# Altium PCB PCB_Auto.PcbDoc (part 2 of 2)
Units mil, origin at the board's own origin, x right, y up, seen from the top; angles counter-clockwise.
Board outline 2561 x 3309 mil, 4 copper layers (Top Layer, Mid Layer 1, Mid Layer 2, Bottom Layer), stack 61.811 mil thick; 134 components, 109 nets, 467 pads, 114 vias.
Unrouted connection lines stored in the file: 1.
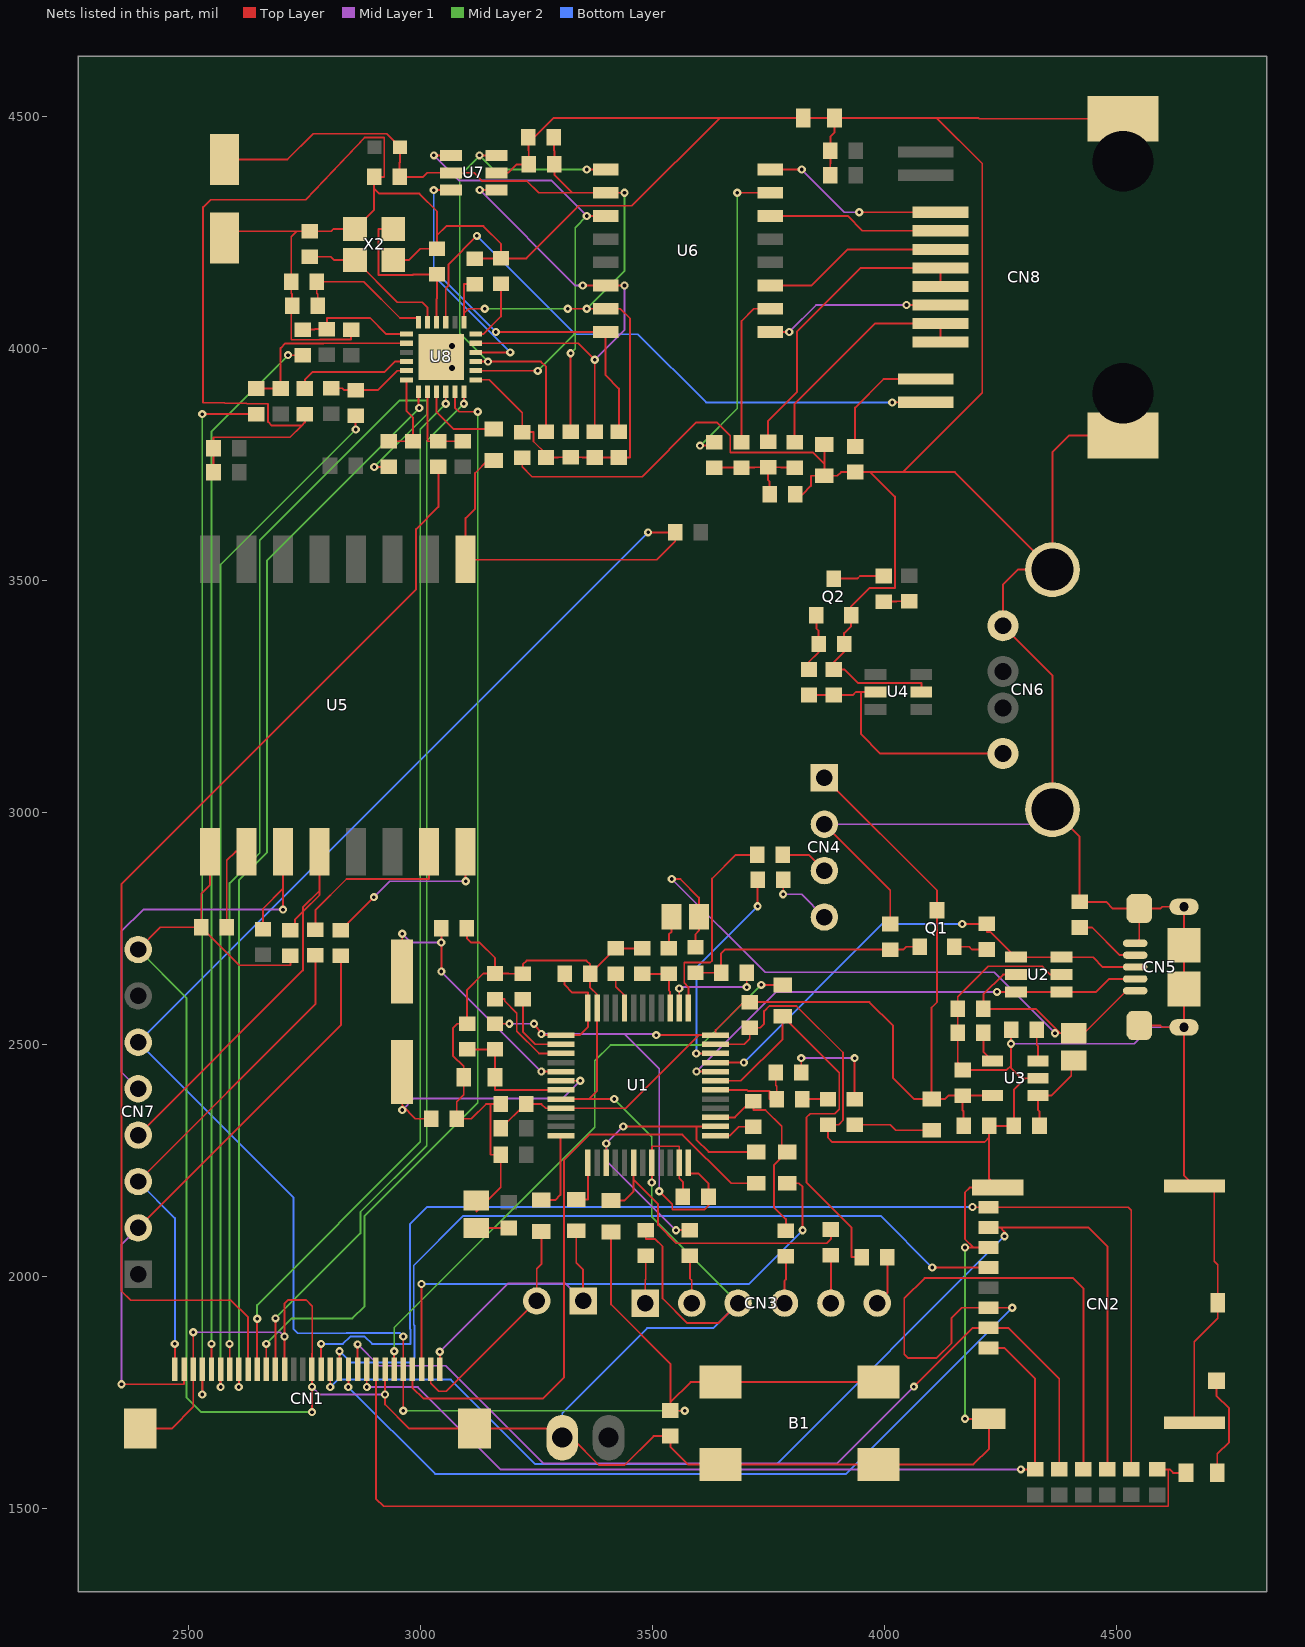
[diagram p4: the nets of this part, all layers, seen from the top]

## Via types
v1: diameter 17.72, hole 7.87, Top Layer to Bottom Layer, 112 vias
v2: diameter 25.98, hole 12.99, Top Layer to Bottom Layer, 2 vias

## Nets (pads, with @x,y where several pads share a name; then routed paths per layer and width w, separated by ;. In a path a pad name is that pad's centre, name@x,y a point inside that pad or via, vN(x,y) a via of type N, cw(c..) or ccw(c..) an arc to the next point about the centre after c; other vN are vias at no path point) (continued)
GND: B1.1 B1.4 C1.2 C2.1 C3.1 C4.2 C5.1 C6.1 C7.2 C8.2 C9.1 C10.2 C11.1 C12.1 C13.1 C14.1 C15.1 C16.2 C17.2 C18.1 C19.1 C20.2 C21.2 C22.2 C23.2 C24.2 C25.2 C26.2 C27.2 C28.1 C29.1 CN1.7 CN1.15 CN1.18 CN1.28 CN1.MP1 CN1.MP2 CN2.DSW2 CN2.MP1 CN2.MP2 CN2.MP3 CN2.MP4 CN2.P6 CN3.3 CN4.2 CN5.5 CN5.S CN6.4 CN6.S CN7.8 CN8.MP1 CN8.MP2 CN9.2 D4.2 D5.1 Q2.2 R8.2 R9.2 R10.2 R11.1 R14.2 R20.1 R28.1 R30.1 R33.1 R36.2 R38.2 R46.2 R52.1 R61.1 R62.1 R63.1 SB2.1 SB10.1 SB10.2 SB11.1 SB11.2 U1.8 U1.20 U1.23 U1.35 U1.47 U2.2 U3.2 U4.2 U5.9 U7.2 U8.25 X2.2 X2.4 | length 22909.3
  Top Layer w4: CN7.8@2392,2704 2440,2752 R36.2@2527.88,2752 ; CN1.MP2@2396.5,1671.44 2464,1671.44 2510.67,1718.11 CN1.28@2510.67,1799.4 v1(2510.67,1879) ; U5.9@2546.61,2915.04 2546.61,2842.73 2527.88,2824 R36.2@2527.88,2752 ; C16.2@2554.44,3733 C17.2@2554.44,3784.25 2554.44,3808 2719.24,3808 2744.24,3833 ; C25.2@2578,4237.35 2578,4252 2733.88,4252 ; CN1.18@2707.52,1799.4 v1(2707.52,1869.85) 2707.52,1941.35 2715.03,1948.86 2753.71,1948.86 2767.06,1935.51 2767.06,1869.63 CN1.15@2766.57,1799.4 v1(2766.57,1761.43) v1(2766.57,1707) ; R38.2@2720,2690.44 2720,2670 2610,2670 2528,2752 R36.2@2527.88,2752 ; R46.2@2751.24,3857.88 2751.24,3840 2744.24,3833 ; C22.2@2851,4040 2851,4019 2784,4019 2783.25,4018.25 2722,4018.25 2722,4091 C21.2@2723.88,4091 2723.88,4116 2721.88,4118 C20.2@2721.88,4143.25 2721.88,4240 2733.88,4252 ; CN1.7@2924.06,1799.4 v1(2924.06,1745) 2924.06,1723.39 2976,1671.44 CN1.MP1@3116.97,1671.44 3306,1671.44 CN9.2@3306,1652 3326,1652 3385,1593 3440.56,1593 3503,1655.44 C1.2@3539,1655.44 3539,1632 3576.58,1594.42 B1.1@3646.72,1594.42 B1.4@3987.28,1594.42 4192,1594.42 4226,1628.42 4226,1692.54 CN2.MP1@4225.53,1692.54 v1(4174,1692.54) ; X2.2@2942,4190.07 2976,4190.07 3000.05,4214.12 C18.1@3036,4214.12 3036,4243 ; C8.2@3100.56,2750 3100.56,2728 3109.14,2719.42 3127.58,2719.42 3161,2686 R11.1@3161,2652.29 ; C23.2@3117,4193.12 3145,4193.12 3145.44,4193.56 R52.1@3174,4193.56 ; D5.1@3121,2163.06 3121,2139 3173.44,2191.44 R14.2@3173.44,2261.56 3151,2261.56 3151,2371 ; U7.2@3164.21,4378 3190,4378 3208,4396 C27.2@3233.88,4396 3233.88,4425 3232.88,4426 C26.2@3232.88,4455 3246,4455 3287,4496 3645,4496 ; C12.1@3173.44,2371 3151,2371 ; C24.2@3219.75,3763.88 3219.75,3744 3240.75,3723 3478,3723 3595,3840 3639,3840 3668,3811 3668,3775 3847,3775 3870.91,3751.09 ; U1.8@3302.82,2381.71 3362.8,2381.71 ; v1(3418,2381.71) 3362.8,2381.71 ; R8.2@3478.65,2706.56 R9.2@3421.39,2706.56 3421,2706.56 C14.1@3366.11,2651.67 ; R20.1@3486,2099.12 3486,2080 3506,2080 3522,2064 3522,1952 3575,1899 3642,1899 CN3.3@3685,1942 ; v1(3499,2202) 3499.2,2202.2 U1.20@3499.2,2244.38 3499.2,2280 3558.26,2280 U1.23@3558.26,2244.38 3558.26,2210.74 3566,2203 C13.1@3566,2170.91 ; U1.35@3636.53,2499.82 3697.82,2499.82 3710,2512 C11.1@3710,2535.44 3732.44,2535.44 3741,2544 3741,2571.25 3752,2582.25 3810.75,2582.25 3911,2482 3911,2336 3901.44,2326.44 D4.2@3878.75,2326.44 3878.75,2298.25 3888,2289 4216,2289 4226,2299 ; C29.1@3808,3685 3824,3685 3842,3703 3842,3725 SB10.2@3870.91,3725 ; SB10.1@3870.91,3792.5 3870.91,3751.09 ; CN4.2@3871,2974 4013,2832 R28.1@4013,2759 ; R62.1@3883.44,4373 3883.44,4398 3883.77,4398.33 R63.1@3883.77,4425.25 3883.77,4456 3893,4465.23 SB11.1@3893,4496 ; U4.2@4079.76,3259 4080,3259 4080,3278 3943.56,3278 3914,3307.56 C15.1@3891,3307.56 3891,3323 3913.56,3345.56 R33.1@3913.56,3362.45 3913.56,3386 3928.4,3400.84 Q2.2@3928.4,3424.63 3928.4,3443.4 3968,3483 4023,3483 4023,3680 3970,3733 ; C6.1@4168.69,2444.25 C6.1@4168.69,2450.31 ; v1(4174,2061.83) 4192,2061.83 ; CN2.P6@4224.94,2061.83 4192,2061.83 ; v1(4273,2501) v1@4273.44,2501.44 ; C4.2@4273.44,2531.16 v1@4273.44,2501.44 ; U3.2@4331.52,2426.53 4304,2426.53 ; U2.2@4382.21,2650 4358,2650 4340,2668 4224,2668 4158.44,2602.44 C2.1@4158.44,2576 C5.1@4158.44,2524.75 4158.44,2460.56 C6.1@4168.69,2450.31 ; CN8.MP1@4514.66,3811.66 4398.04,3811.66 4362.38,3776 CN6.S@4362.38,3522.66 ; CN8.MP2@4514.66,4494.34 4204.66,4494.34 4203,4496 4113,4496 ; CN5.5@4540.69,2717.43 4549.54,2726.28 CN5.S@4549.54,2792.23 ; CN5.S@4549.54,2540.26 4595,2540.26 4598.94,2536.32 CN5.S@4646,2536.32 ; CN2.MP4@4668.44,1683.88 4668,1683.88 4668,1858.57 4718.64,1909.21 CN2.DSW2@4718.64,1942.74 4718.64,2025 4711,2032.64 4711,2194.12 CN2.MP3@4668.44,2194.12 4646,2216.56 CN5.S@4646,2536.32 ; 2733.88,4252 C19.1@2762,4252 2808,4252 2813,4257 X2.4@2859.32,4257 2900.44,4298.12 2900.44,4344 ; 2744.24,3833 2680,3833 2672,3841 2672,3880 2532,3883 2532,4304 2548,4320 2753,4320 2880,4454 2922.5,4454 2922.5,4369 C28.1@2900.44,4369 2900.44,4344 ; 2900.44,4344 2911.44,4333 2998,4333 3036,4295 3036,4243 ; 3036,4243 3056,4263 3136,4263 3174,4225 R52.1@3174,4193.56 ; 3151,2371 3141.6,2371 3110,2339.4 C10.2@3078.56,2339.4 3078.56,2376 3093.58,2391.02 SB2.1@3093.58,2429.14 3093.58,2452 3070.42,2475.15 3070.42,2534.28 3080,2543.85 C9.1@3101,2543.85 3101,2617.29 3136,2652.29 R11.1@3161,2652.29 ; R11.1@3161,2652.29 3190,2652.29 3190.61,2651.68 R10.2@3221,2651.68 3221,2672 3229,2680 3358.11,2680 3366.11,2672 C14.1@3366.11,2651.67 ; R52.1@3174,4193.56 3228.56,4193.56 3342,4307 3456,4307 3645,4496 ; 3362.8,2381.71 3381.09,2400 U1.47@3381.09,2578.08 3381.09,2607 3366.11,2621.98 C14.1@3366.11,2651.56 C14.1@3366.11,2651.67 ; 3645,4496 SB11.2@3825.5,4496 SB11.1@3893,4496 ; SB10.2@3870.91,3725 3870.91,3751.09 ; SB10.2@3870.91,3725 3899,3725 3907,3733 R61.1@3937,3733 3970,3733 ; SB11.1@3893,4496 4113,4496 ; 3970,3733 4040,3733 ; 4040,3733 4152.04,3733 CN6.S@4362.38,3522.66 ; 4040,3733 4211,3904 4211,4398 4113,4496 ; C6.1@4168.69,2450.31 4174.56,2444.44 4264,2444.44 4273.44,2453.88 ; 4192,2061.83 4174,2079.83 4174,2180.97 4184,2190.97 CN2.MP2@4244.62,2190.97 4226,2209.59 4226,2299 ; 4226,2299 C7.2@4226,2324 C3.1@4279.32,2324 4279.32,2401.85 4304,2426.53 ; 4273.44,2453.88 4273.44,2501 v1@4273.44,2501.44 ; 4273.44,2453.88 4273.44,2448 4294.91,2426.53 4304,2426.53 ; CN6.S@4362.38,3522.66 4288,3522.66 4255.69,3490.35 CN6.4@4255.69,3401.8 4362.38,3295.1 CN6.S@4362.38,3005.34 4421,2946.72 R30.1@4421,2806.56 4478,2806.56 4492.33,2792.23 CN5.S@4549.54,2792.23 ; CN5.S@4549.54,2792.23 4595,2792.23 4598.94,2796.17 CN5.S@4646,2796.17 CN5.S@4646,2713.49 CN5.S@4646,2619 CN5.S@4646,2536.32
  Mid Layer 1 w4: v1(2510.67,1879) 2698.37,1879 v1(2707.52,1869.85) ; v1(2766.57,1761.43) 2783,1745 v1(2924.06,1745) ; CN4.2@3871,2974 4331.04,2974 CN6.S@4362.38,3005.34 ; v1(4273,2501) 4538.68,2501 4574,2536.32 CN5.S@4646,2536.32
  Mid Layer 2 w4: CN7.8@2392,2704 2496,2600 2496,1739 2528,1707 v1(2766.57,1707) ; v1(3418,2381.71) 3499,2300.71 v1(3499,2202) 3499,2128 CN3.3@3685,1942 ; v1(4174,1692.54) v1(4174,2061.83)
  Bottom Layer w4: CN9.2@3306,1652 3306,1705 3489,1888 3631,1888 CN3.3@3685,1942
  other v2: 3068.62,3957.38 3068.62,4004.62
GPIO0: CN7.4 R38.1 U5.12 | length 890
  Top Layer w4: CN7.4@2392,2304 2747,2659 2747,2785.17 ; R38.1@2720,2745.56 2729.83,2745.56 2729.83,2768 2747,2785.17 ; U5.12@2782.83,2915.04 2782.83,2830.83 ; 2747,2785.17 2782.83,2821 2782.83,2830.83 ; 2747,2785.17 2747,2795 2782.83,2830.83
GPIO2: CN7.5 R37.1 U5.11 | length 951.9
  Top Layer w4: R37.1@2661,2747.56 2661,2792 2704.09,2835.09 ; v1(2704.09,2790) 2704.09,2835.09 ; U5.11@2704.09,2915.04 2704.09,2835.09
  Mid Layer 1 w4: CN7.5@2392,2404 2356,2440 2356,2743 2403,2790 v1(2704.09,2790)
JTCK: CN1.4 SB6.2 | length 1344
  Top Layer w4: CN1.4@2983.11,1799.4 2983.11,1760 3007.11,1736 3264,1736 3310,1782 3310,2251 3364,2305 3565,2305 3669.75,2200.25 SB6.2@3724,2200.25
JTMS: CN1.3 SB7.2 | length 1182.4
  Top Layer w4: CN1.3@3002.8,1799.4 v1(3002.8,1983) ; SB7.2@3791,2200.25 3816,2200.25 3824,2192.25 v1(3824,2099)
  Bottom Layer w4: v1(3002.8,1983) 3708,1983 v1(3824,2099)
LED_STLINK: R16.2 R17.2 U1.30 | length 208.3
  Top Layer w4: U1.30@3636.53,2401.39 3704,2401.39 3706.39,2399 3753,2399 3753,2381.75 R16.2@3768.34,2381.75 3768.34,2409 3766,2411.34 R17.2@3766,2439
NC: CN8.7 CN8.8 R60.2 | length 508.3
  Top Layer w4: R60.2@3806.76,3797.56 3806.76,3880 3979.76,4053 CN8.7@4120.96,4053 CN8.8@4120.96,4013
NetC3_2: C3.2 D1.2 U3.1 | length 193.5
  Top Layer w4: C3.2@4334.44,2324 4334.44,2355 4331.52,2357.91 U3.1@4331.52,2389.13 4360.13,2389.13 4403,2432 4403,2464.47 D1.2@4408.46,2464.47
NetC4_1: C4.1 U3.3 | length 68.5
  Top Layer w4: C4.1@4328.56,2531.16 4328.56,2498.96 4331.52,2496 U3.3@4331.52,2463.93
NetC5_2: C5.2 U3.4 | length 68.9
  Top Layer w4: C5.2@4213.56,2524.75 4213.56,2483.47 U3.4@4233.1,2463.93
NetC8_1: C8.1 U1.5 X1.2 | length 614.5
  Top Layer w4: X1.2@2961,2656.41 v1(2961,2738.17) ; v1(3045,2719) v1@3045.44,2719.44 ; v1(3045.44,2656.56) v1@3045.44,2719.44 ; C8.1@3045.44,2750 v1@3045.44,2719.44 ; v1(3261,2441) 3261.24,2440.76 U1.5@3302.82,2440.76
  Mid Layer 1 w4: v1(2961,2738.17) 2980.17,2719 v1(3045,2719) ; v1(3045.44,2656.56) v1(3261,2441)
NetC9_2: C9.2 R12.1 SB2.2 U1.7 | length 289.1
  Top Layer w4: C9.2@3101,2488.73 R12.1@3161,2488.73 3161,2458.08 3161.08,2458 SB2.2@3161.08,2429.14 3161.08,2401.39 U1.7@3302.82,2401.39
NetC10_1: C10.1 U1.6 X1.1 | length 608.5
  Top Layer w4: v1(2961,2358) 2961,2368 ; X1.1@2961,2439.88 2961,2368 ; C10.1@3023.44,2339.4 2989.6,2339.4 2961,2368 ; U1.6@3302.82,2421.08 3344.92,2421.08 v1(3345,2421)
  Mid Layer 1 w4: v1(2961,2358) 2986,2383 3307,2383 v1(3345,2421)
NetC18_2: C18.2 U8.4 X2.3 | length 361
  Top Layer w4: X2.3@2942,4257 2910,4257 2910,4158 2984,4158 2985,4159 C18.2@3036,4159 3036,4106.84 3035.16,4106 U8.4@3035.16,4055.8
NetC19_2: C19.2 U8.5 X2.1 | length 330.8
  Top Layer w4: C19.2@2762,4196.88 2807,4196.88 2813.81,4190.07 X2.1@2859.32,4190.07 2950.39,4099 3004.47,4099 3015.47,4088 U8.5@3015.47,4055.8
NetC20_1: C20.1 C21.1 U8.6 | length 313.5
  Top Layer w4: C21.1@2779,4091 2779,4116 2777,4118 C20.1@2777,4143.25 2878,4143.25 2956.25,4065 2995.79,4065 U8.6@2995.79,4055.8
NetC23_1: C23.1 C24.1 C25.1 C26.1 C27.1 C28.2 L1.1 R53.2 R54.2 R55.2 R56.2 U6.2 U6.7 U7.5 U8.1 U8.19 | length 2621.6
  Top Layer w4: C25.1@2578,4406.65 2713.65,4406.65 2769,4462 2927.5,4462 L1.1@2956.5,4433 2956.5,4400.94 2955.56,4400 C28.2@2955.56,4369 3006,4369 3015,4378 U7.5@3065.79,4378 3116,4378 3134,4360 3230,4360 3255,4335 3328,4335 ; U8.1@3094.21,4055.8 3094.21,4075.21 ; C23.1@3117,4138 3094.21,4138 3094.21,4075.21 ; U8.19@3119.8,3931.79 3148.96,3931.79 3219.75,3861 C24.1@3219.75,3819 3244,3819 3244,3798.88 3271,3771.88 R56.2@3271,3764.44 3297,3764.44 3297.44,3764.88 R55.2@3324,3764.88 3349,3764.88 3349.44,3764.44 R54.2@3376,3764.44 R53.2@3428,3764.44 3452,3764.44 3452,4064 3431,4085 U6.7@3399.44,4085 v1(3359,4085) v1(3318,4085) ; v1(3139,4085) 3104,4085 3094.21,4075.21 ; C26.1@3288,4455 3288,4426 3289,4425 C27.1@3289,4396 3289,4374 3328,4335 ; v1(3440,4335) U6.2@3399.44,4335 3328,4335
  Mid Layer 2 w4: v1(3139,4085) v1(3318,4085) ; v1(3359,4085) 3440,4166 v1(3440,4335)
NetC29_2: C29.2 R57.1 R58.1 R59.1 R60.1 | length 233.4
  Top Layer w4: R58.1@3634,3742.44 R57.1@3692.25,3742.44 3720,3742.44 3721,3743.44 R59.1@3749.51,3743.44 ; C29.2@3752.88,3685 3752.88,3712 3749.51,3715.37 R59.1@3749.51,3743.44 ; R60.1@3806.76,3742.44 3778,3742.44 3777,3743.44 R59.1@3749.51,3743.44
NetCN2_DSW1: CN2.DSW1 SB1.1 | length 220.6
  Top Layer w4: CN2.DSW1@4715.69,1774.83 4715.69,1742.31 4743,1715 4743,1642.25 4717.75,1617 SB1.1@4717.75,1576
NetCN3_1: CN3.1 R20.2 | length 102.4
  Top Layer w4: CN3.1@3485,1942 3485,1992 3486,1993 R20.2@3486,2044
NetCN3_2: CN3.2 R19.2 | length 103.7
  Top Layer w4: R19.2@3581,2044 3581,1995 3585,1991 CN3.2@3585,1942
NetCN3_4: CN3.4 R21.2 | length 102.1
  Top Layer w4: CN3.4@3785,1942 3785,1990 3788,1993 R21.2@3788,2042.88
NetCN3_5: CN3.5 R22.2 | length 103.4
  Top Layer w4: CN3.5@3885,1942 R22.2@3885,2045.44
NetCN3_6: CN3.6 R23.2 | length 107.9
  Top Layer w4: CN3.6@3985,1942 4006.56,1963.56 R23.2@4006.56,2041
NetCN4_3: CN4.3 R24.2 | length 103.5
  Top Layer w4: R24.2@3781.56,2908 3837,2908 CN4.3@3871,2874
NetCN4_4: CN4.4 R25.2 | length 140.3
  Top Layer w4: v1(3782,2823) 3782.12,2823.12 R25.2@3782.12,2854
  Mid Layer 1 w4: v1(3782,2823) 3822,2823 CN4.4@3871,2774
NetCN5_4: CN5.4 R30.2 | length 144.4
  Top Layer w4: R30.2@4421,2751.44 4448,2751.44 4507.61,2691.83 CN5.4@4540.69,2691.83
NetCN8_4: CN8.4 CN8.5 R59.2 | length 669
  Top Layer w4: R59.2@3749.51,3798.56 3749.51,3843.51 3812,3906 3812,4036 3949,4173 CN8.4@4120.96,4173 CN8.5@4120.96,4133
NetD2_2: D2.2 R7.1 | length 70
  Top Layer w4: R7.1@3535.9,2706.56 3535.9,2737 3541.47,2742.57 D2.2@3541.47,2774.25
NetD3_1: D3.1 SB5.1 | length 170.9
  Top Layer w4: D3.1@3936,2326.44 4013,2326.44 4024.94,2314.5 SB5.1@4102,2314.5
NetD3_2: D3.2 R17.1 | length 234.3
  Top Layer w4: R17.1@3821.12,2439 v1(3821.12,2470) ; D3.2@3936,2381.56 v1(3936,2470)
  Mid Layer 1 w4: v1(3821.12,2470) v1(3936,2470)
NetD4_1: D4.1 R16.1 | length 55.4
  Top Layer w4: R16.1@3823.46,2381.75 3847.03,2381.75 3847.21,2381.56 D4.1@3878.75,2381.56
NetD5_2: D5.2 R18.2 | length 70
  Top Layer w4: D5.2@3121,2104 3155,2104 3155.12,2103.88 R18.2@3191,2103.88
NetD6_1: D6.1 R31.1 | length 55.5
  Top Layer w4: D6.1@3998.75,3453.88 4026,3453.88 4026.56,3454.44 R31.1@4054,3454.44
NetD6_2: D6.2 Q2.3 | length 110.1
  Top Layer w4: Q2.3@3891,3503.37 3942,3503.37 3947.63,3509 D6.2@3998.75,3509
NetQ1_1: Q1.1 R26.2 R27.1 R28.2 | length 530.8
  Top Layer w4: R27.1@3593.16,2654 R26.2@3648.44,2654 3648.44,2696 3656.32,2703.88 R28.2@4013,2703.88 4041,2703.88 4047.12,2710 Q1.1@4076.2,2710
NetQ1_2: Q1.2 R29.1 | length 72.5
  Top Layer w4: Q1.2@4151,2710 4183,2710 4189,2704 R29.1@4221,2704
NetQ2_1: Q2.1 R32.1 R33.2 | length 127.6
  Top Layer w4: R32.1@3837.75,3307.56 3837.75,3324 3858.44,3344.69 R33.2@3858.44,3362.45 3858.44,3391 3853.6,3395.84 Q2.1@3853.6,3424.63
NetR7_2: R7.2 R8.1 U1.39 | length 131.7
  Top Layer w4: R8.1@3478.65,2651.44 3507,2651.44 R7.2@3535.9,2651.44 3535.9,2615.67 3538.57,2613 U1.39@3538.57,2578.08
NetR9_1: R9.1 U1.44 | length 81.1
  Top Layer w4: R9.1@3421.39,2651.44 3421.39,2623.75 3440.15,2605 U1.44@3440.15,2578.08
NetR10_1: R10.1 U1.2 | length 162.8
  Top Layer w4: R10.1@3221,2596.56 3221,2526.82 3248,2499.82 U1.2@3302.82,2499.82
NetR11_2: R11.2 U1.3 | length 215.6
  Top Layer w4: R11.2@3161,2597.17 3182,2597.17 3182,2593 3208,2567 3208,2528 3255.87,2480.13 U1.3@3302.82,2480.13
NetR36_1: R36.1 U5.10 | length 194.2
  Top Layer w4: R36.1@2583,2752 2583,2896 2602.04,2915.04 U5.10@2625.35,2915.04
NetR39_2: R39.2 U5.15 | length 373.8
  Top Layer w4: R39.2@2774,2747 2774,2789 2841,2856 3019.06,2856 U5.15@3019.06,2915.04
NetR40_2: R40.2 U5.16 | length 377.1
  Top Layer w4: R40.2@2829,2745.56 2829,2746 v1(2900,2817) ; U5.16@3097.8,2915.04 3097.8,2851.2 v1(3098,2851)
  Mid Layer 1 w4: v1(2900,2817) 2934,2851 v1(3098,2851)
NetR41_1: R41.1 R44.1 U8.8 | length 414.8
  Top Layer w4: R44.1@2646.73,3913 2672,3913 2672.12,3913.12 R41.1@2698.98,3913.12 2698.98,4000 2709.23,4010.25 2792.1,4010.25 2792.38,4010.53 U8.8@2970.2,4010.53
NetR42_1: R42.1 R45.1 U8.7 | length 262.5
  Top Layer w4: R45.1@2746.49,4040 2772,4040 2773,4041 R42.1@2798.75,4041 2798.75,4065 2892.21,4065 2927,4030.21 U8.7@2970.2,4030.21
NetR43_1: R43.1 R47.1 U8.11 | length 180.7
  Top Layer w4: R43.1@2808.49,3913.7 2832,3913.7 2836,3909.7 R47.1@2860.75,3909.7 2908.23,3909.7 2950,3951.47 U8.11@2970.2,3951.47
NetR46_1: R46.1 U8.10 | length 254.3
  Top Layer w4: R46.1@2751.24,3913 2751.24,3932.24 2768,3949 2923,3949 2945.16,3971.16 U8.10@2970.2,3971.16
NetR48_1: R48.1 R49.1 U8.12 | length 190.6
  Top Layer w4: R48.1@2932,3799.26 R49.1@2984.25,3799.26 2984.25,3851 2970.2,3865.06 U8.12@2970.2,3931.79
NetR50_1: R50.1 R51.1 U8.14 | length 182.7
  Top Layer w4: U8.14@3015.47,3906.2 3015.47,3799.26 R50.1@3039,3799.26 R51.1@3091.25,3799.26
NetR52_2: R52.2 U8.24 | length 140
  Top Layer w4: U8.24@3119.8,4030.21 3135.73,4030.21 3174,4068.48 R52.2@3174,4138.44
NetR57_2: R57.2 U6.10 | length 334.1
  Top Layer w4: R57.2@3692.25,3797.56 3692.25,4058.25 3719,4085 U6.10@3754.56,4085
NetR58_2: R58.2 U6.15 | length 688.3
  Top Layer w4: v1(3603,3790) 3634,3790 R58.2@3634,3797.56 ; v1(3683,4335) U6.15@3754.56,4335
  Mid Layer 2 w4: v1(3603,3790) 3683,3870 v1(3683,4335)
NetSB3_2: SB3.2 U1.12 | length 174.3
  Top Layer w4: SB3.2@3261,2164.06 3291.06,2164.06 3302,2175 3302,2302.97 U1.12@3302.82,2302.97
NetSB4_2: SB4.2 U1.13 | length 104.5
  Top Layer w4: SB4.2@3336,2165.31 3361.41,2165.31 U1.13@3361.41,2244.38
NetSB12_2: SB12.2 U8.15 | length 182
  Top Layer w4: U8.15@3035.16,3906.2 3035.16,3862.34 3072,3825.5 SB12.2@3158,3825.5
NRST: B1.2 B1.3 C1.1 CN1.5 CN7.6 R34.1 SB8.2 SB12.1 U5.1 | length 5049
  Top Layer w4: v1(2963.43,1710) CN1.5@2963.43,1799.4 v1(2963.43,1870) ; SB12.1@3158,3758 3145,3758 3118,3731 3118,3654 3097.8,3633.8 U5.1@3097.8,3544.96 3097.8,3544 3509.44,3544 3549.44,3584 R34.1@3549.44,3603 v1(3491,3603) ; SB8.2@3411,2095.25 3411,1939 3539,1811 3539,1728 ; v1(3570,1710) 3539,1710 C1.1@3539,1710.56 3539,1728 ; B1.3@3987.28,1771.58 B1.2@3646.72,1771.58 3582.58,1771.58 3539,1728
  Mid Layer 2 w4: v1(2963.43,1710) v1(3570,1710)
  Bottom Layer w4: v1(2963.43,1870) 2955.72,1877.71 2841.14,1877.71 2840.43,1877 2736,1877 2727,1886 2727,2169 CN7.6@2392,2504 v1(3491,3603)
RD_N: R53.1 U6.8 U7.6 U8.22 | length 1178.4
  Top Layer w4: v1(3029,4340.6) U7.6@3065.79,4340.6 ; U8.22@3119.8,3990.84 v1(3194,3990.84) ; v1(3163,4035) U6.8@3399.44,4035 3399.44,3941.56 3428,3913 R53.1@3428,3819.56
  Bottom Layer w4: v1(3029,4340.6) 3029,4169 3035.58,4162.42 ; v1(3163,4035) 3035.58,4162.42 ; v1(3194,3990.84) 3029,4155.84 3035.58,4162.42
RD_P: R54.1 U6.6 U7.1 U8.23 | length 1046.6
  Top Layer w4: U8.23@3119.8,4010.53 3340.47,4010.53 v1(3376,3975) R54.1@3376,3819.56 ; v1(3128,4341) 3128.4,4340.6 U7.1@3164.21,4340.6 ; v1(3350,4135) U6.6@3399.44,4135 v1(3440,4135)
  Mid Layer 1 w4: v1(3128,4341) 3334,4135 v1(3350,4135) ; v1(3376,3975) 3440,4039 v1(3440,4135)
RMII_CRS_DV: CN1.25 R47.2 | length 2252.5
  Top Layer w4: v1(2569.72,1761) CN1.25@2569.72,1799.4 ; v1(2860.75,3824.75) R47.2@2860.75,3854.58
  Mid Layer 2 w4: v1(2569.72,1761) 2569.72,3533.72 v1(2860.75,3824.75)
RMII_MDC: CN1.23 U8.13 | length 2345.7
  Top Layer w4: v1(2609,1761) 2609.09,1761.09 CN1.23@2609.09,1799.4 ; U8.13@2995.79,3906.2 2995.79,3873.21 v1(2998,3871)
  Mid Layer 2 w4: v1(2609,1761) 2609,2853 2670,2914 2670,3543 v1(2998,3871)
RMII_MDIO: CN1.24 R48.2 | length 2519.5
  Top Layer w4: v1(2589,1854) 2589.41,1853.59 CN1.24@2589.41,1799.4 ; v1(2901,3744) 2932,3744 R48.2@2932,3744.14
  Mid Layer 2 w4: v1(2589,1854) 2589,2847 2654,2912 2654,3586.28 2954.72,3887 3014,3887 3014,3857 v1(2901,3744)
RMII_REF_CLK: CN1.22 R50.2 | length 2467.2
  Top Layer w4: CN1.22@2628.78,1799.4 2628.78,1911.22 2592,1948 2376,1948 2356,1968 2356,2845 2991,3480 2991,3610 3039,3658 R50.2@3039,3744.14
RMII_RXD0: CN1.27 R44.2 | length 2284.2
  Top Layer w4: v1(2530,1745) 2530.35,1745.35 CN1.27@2530.35,1799.4 ; v1(2530,3857.88) R44.2@2646.73,3857.88
  Mid Layer 2 w4: v1(2530,1745) v1(2530,3857.88)
RMII_RXD1: CN1.26 R45.2 | length 2285.5
  Top Layer w4: v1(2550,1854) v1(2550,1854) CN1.26@2550.04,1799.4 ; v1(2715,3985) 2715.12,3984.88 R45.2@2746.49,3984.88
  Mid Layer 2 w4: v1(2550,1854) 2550,3820 v1(2715,3985)
RMII_TX_EN: CN1.21 U8.16 | length 2275.3
  Top Layer w4: CN1.21@2648.46,1799.4 v1(2648.46,1908) ; U8.16@3054.84,3906.2 3054.84,3880.16 v1(3055,3880)
  Mid Layer 2 w4: v1(2648.46,1908) 2648.46,1937.68 3000.07,2289.29 3000.07,3825.07 v1(3055,3880)
RMII_TXD0: CN1.20 U8.17 | length 2416.5
  Top Layer w4: CN1.20@2668.15,1799.4 v1(2668.15,1854.07) ; U8.17@3074.53,3906.2 3074.53,3872 3083.53,3863 v1(3124,3863)
  Mid Layer 2 w4: v1(2668.15,1854.07) 2722.94,1908.86 2853.86,1908.86 2880,1935 2880,2130 3124,2374 v1(3124,3863)
RMII_TXD1: CN1.19 U8.18 | length 2275.1
  Top Layer w4: CN1.19@2687.83,1799.4 v1(2687.83,1909) ; v1(3094,3880) 3094.21,3880.21 U8.18@3094.21,3906.2
  Mid Layer 2 w4: v1(2687.83,1909) 2871,2092.17 2871,2138.29 3014,2281.29 3014,3800 v1(3094,3880)
RX: CN1.2 SB3.1 W1.2 | length 500.4
  Top Layer w4: CN1.2@3022.48,1799.4 3022.48,1769.52 3040,1752 3056.44,1752 W1.2@3251,1946.56 3251,2016 3261,2026 SB3.1@3261,2096.56
RX_N: CN8.6 U6.9 | length 390.4
  Top Layer w4: U6.9@3754.56,4035 v1(3795,4035) ; v1(4048,4093) CN8.6@4120.96,4093
  Mid Layer 1 w4: v1(3795,4035) 3853,4093 v1(4048,4093)
RX_P: CN8.3 U6.11 | length 398.7
  Top Layer w4: U6.11@3754.56,4135 3843,4135 3921,4213 CN8.3@4120.96,4213
RXD0: CN1.30 CN7.3 R39.1 | length 1083.6
  Top Layer w4: CN7.3@2392,2204 2774,2586 R39.1@2774,2691.88 ; v1(2471,1854) 2471.3,1853.7 CN1.30@2471.3,1799.4
  Bottom Layer w4: CN7.3@2392,2204 2471,2125 v1(2471,1854)
STLINK_3V3: C6.2 C7.1 C11.2 C12.2 C13.2 C14.2 CN4.1 Q1.3 R12.2 R13.2 SB5.2 U1.1 U1.9 U1.24 U1.36 U1.48 U3.5 | length 3548.6
  Top Layer w4: R12.2@3161,2543.85 3161,2544 v1(3192,2544) ; R13.2@3173.44,2318.81 3174,2318.81 3226.19,2371 C12.2@3228.56,2371 3261,2371 3269.98,2362.02 U1.9@3302.82,2362.02 3442.52,2362.02 3600,2519.5 ; v1(3245,2544) 3261.39,2522.29 v1@3263.5,2519.5 ; v1(3261,2522) v1@3263.5,2519.5 ; C14.2@3310.99,2651.56 3310.99,2628.01 3328,2611 3361.41,2611 U1.48@3361.41,2578.08 3361.41,2536.91 3344,2519.5 U1.1@3302.82,2519.5 v1@3263.5,2519.5 ; v1(3508.5,2519.5) 3600,2519.5 ; v1(3515,2183) 3543,2155 3543,2144 3613.12,2144 3621.12,2152 C13.2@3621.12,2170.91 3621.12,2199.88 3600,2221 3577.94,2221 U1.24@3577.94,2244.38 ; CN4.1@3871,3074 4113.6,2831.4 Q1.3@4113.6,2788.74 4113.6,2590.6 4102,2579 SB5.2@4102,2382 ; C7.1@4170.88,2324 4170.88,2355 4168.69,2357.19 C6.2@4168.69,2389.13 ; U3.5@4233.1,2389.13 C6.2@4168.69,2389.13 ; 3600,2519.5 U1.36@3636.53,2519.5 3636.53,2530.53 3696.56,2590.56 C11.2@3710,2590.56 3968,2590.56 4019,2539.56 4019,2427 4064,2382 SB5.2@4102,2382 ; SB5.2@4102,2382 4131,2382 4138.13,2389.13 C6.2@4168.69,2389.13
  Mid Layer 1 w4: v1(3192,2544) v1(3245,2544) ; v1(3261,2522) 3440,2522 ; v1(3508.5,2519.5) 3506,2522 3440,2522 ; v1(3515,2183) 3515,2447 3440,2522
STLINK_N: CN5.2 U1.32 U2.1 U2.6 | length 1069.5
  Top Layer w4: v1(3595.24,2441) 3595.48,2440.76 U1.32@3636.53,2440.76 ; v1(4243,2612.6) U2.6@4283.79,2612.6 U2.1@4382.21,2612.6 4456.94,2612.6 4485,2640.65 CN5.2@4540.69,2640.65
  Mid Layer 1 w4: v1(3595.24,2441) 3766.84,2612.6 v1(4243,2612.6)
STLINK_P: CN5.3 R29.2 U1.33 U2.3 U2.4 | length 1076.4
  Top Layer w4: U1.33@3636.53,2460.45 v1(3697.45,2460.45) ; v1(4168,2759.12) R29.2@4221,2759.12 4221,2742 4228.39,2742 4282.98,2687.4 U2.4@4283.79,2687.4 U2.3@4382.21,2687.4 4450,2687.4 4471.16,2666.24 CN5.3@4540.69,2666.24
  Bottom Layer w4: v1(3697.45,2460.45) 3996.12,2759.12 v1(4168,2759.12)
STM_JTCK: R24.1 U1.37 | length 458.8
  Top Layer w4: U1.37@3577.94,2578.08 3577.94,2623.06 3569,2632 3569,2676 3625,2676 3629,2680 3629,2857 3680,2908 R24.1@3726.44,2908
STM_JTMS: R25.1 U1.34 | length 470.3
  Top Layer w4: v1(3595,2480) 3595.13,2480.13 U1.34@3636.53,2480.13 ; v1(3727,2797) R25.1@3727,2854
  Bottom Layer w4: v1(3595,2480) 3595,2665 v1(3727,2797)
SWO: CN1.6 SB9.2 | length 1316.5
  Top Layer w4: CN1.6@2943.74,1799.4 2943.74,1837.74 v1(2944,1838) ; v1(3734.75,2627.75) SB9.2@3781,2627.75
  Mid Layer 2 w4: v1(2944,1838) 2944,1889.4 3376,2321.4 3376,2464 3410,2498 3605,2498 v1(3734.75,2627.75)
T_JRST: R22.1 SB8.1 U1.18 | length 651.3
  Top Layer w4: SB8.1@3411,2162.75 3440,2162.75 3459.83,2182.58 3459.83,2208 ; U1.18@3459.83,2244.38 3459.83,2208 ; R22.1@3885,2100.56 3885,2080 3876,2071 3552,2071 3512.39,2110.61 3512.39,2155.44 3459.83,2208
T_JTCK: R19.1 SB6.1 U1.15 U1.26 | length 740.1
  Top Layer w4: U1.15@3400.78,2244.38 3400.78,2285.78 v1(3401,2286) ; v1(3437.65,2322.65) 3595,2322.65 ; v1(3551,2099) 3551.12,2099.12 R19.1@3581,2099.12 ; U1.26@3636.53,2322.65 3595,2322.65 ; SB6.1@3724,2267.75 3621.25,2267.75 3595,2294 3595,2322.65
  Mid Layer 1 w4: v1(3437.65,2322.65) v1(3401,2286) 3401,2249 v1(3551,2099)
T_JTMS: R15.1 R21.1 SB7.1 U1.27 | length 450.1
  Top Layer w4: U1.27@3636.53,2342.34 3678,2342.34 3712.68,2377.02 R15.1@3717.9,2377.02 3717.9,2358 3744,2358 3779,2323 3779,2267.75 SB7.1@3791,2267.75 3762,2238.75 3762,2149 3788,2123 R21.1@3788,2098
T_SWDIO_IN: R15.2 U1.25 | length 89.2
  Top Layer w4: U1.25@3636.53,2302.97 3667,2302.97 3685.93,2321.9 R15.2@3717.9,2321.9
T_SWO: R23.1 SB9.1 U1.31 | length 923.8
  Top Layer w4: U1.31@3636.53,2421.08 3691.08,2421.08 3781,2511 SB9.1@3781,2560.25 3903,2438.25 3903,2360 3893,2350 3840,2350 3832,2342 3832,2202 3929,2105 3929,2041 R23.1@3951.44,2041
TD_N: R55.1 U6.3 U7.4 U8.20 | length 1188.1
  Top Layer w4: v1(3029.31,4415.4) U7.4@3065.79,4415.4 ; U8.20@3119.8,3951.47 3252.53,3951.47 v1(3253,3951) ; R55.1@3324,3820 v1(3324,3989) ; v1(3359,4285) U6.3@3399.44,4285
  Mid Layer 1 w4: v1(3029.31,4415.4) 3083.71,4361 3283,4361 v1(3359,4285)
  Mid Layer 2 w4: v1(3253,3951) 3334,4032 ; v1(3324,3989) 3334,3999 3334,4032 ; v1(3359,4285) 3334,4260 3334,4032
TD_P: R56.1 U6.1 U7.3 U8.21 | length 1104.7
  Top Layer w4: U8.21@3119.8,3971.16 3145.84,3971.16 v1(3146,3971) 3260,3971 3271,3960 R56.1@3271,3819.56 ; v1@3128.07,4415.07 v1(3127.73,4415.4) U7.3@3164.21,4415.4 ; v1(3359,4385) U6.1@3399.44,4385
  Mid Layer 2 w4: v1(3127.73,4415.4) v1@3128.07,4415.07 ; v1(3146,3971) 3085,4032 3085,4372 v1@3128.07,4415.07 ; v1(3359,4385) 3158.13,4385 v1@3128.07,4415.07
TX: CN1.1 SB4.1 W1.1 | length 580.4
  Top Layer w4: CN1.1@3042.17,1799.4 v1(3042.17,1837.17) ; SB4.1@3336,2097.81 3336,2029 3351,2014 W1.1@3351,1946.56
  Mid Layer 1 w4: v1(3042.17,1837.17) 3189,1984 3313.56,1984 W1.1@3351,1946.56
TX_N: CN8.2 U6.14 | length 379.7
  Top Layer w4: U6.14@3754.56,4285 3921,4285 3953,4253 CN8.2@4120.96,4253
TX_P: CN8.1 U6.16 | length 404.5
  Top Layer w4: U6.16@3754.56,4385 v1(3822,4385) ; v1(3946,4293) CN8.1@4120.96,4293
  Mid Layer 1 w4: v1(3822,4385) 3914,4293 v1(3946,4293)
TXD0: CN1.29 CN7.2 R40.1 | length 1286.7
  Top Layer w4: v1(2356,1767) 2490.98,1767 CN1.29@2490.98,1799.4 ; CN7.2@2392,2104 2829,2541 R40.1@2829,2690.44
  Mid Layer 1 w4: v1(2356,1767) 2356,2068 CN7.2@2392,2104
USB5V: C2.2 CN5.1 D1.1 D2.1 R27.2 U2.5 | length 1665.7
  Top Layer w4: v1(3542,2856) 3560.53,2856 3600.53,2816 D2.1@3600.53,2774.25 3600.53,2744.37 3593.16,2737 R27.2@3593.16,2709.12 ; U2.5@4283.79,2650 4256,2650 4213.56,2607.56 C2.2@4213.56,2576 4326.39,2576 4378.86,2523.53 ; v1(4368,2523.53) 4378.86,2523.53 ; CN5.1@4540.69,2615.06 4522,2615.06 4430.47,2523.53 D1.1@4408.46,2523.53 4378.86,2523.53
  Mid Layer 1 w4: v1(3542,2856) 3743,2655 4236.53,2655 v1(4368,2523.53)
USB_RENUMn: R26.1 U1.38 | length 219.8
  Top Layer w4: v1(3558,2620) 3558.26,2619.74 U1.38@3558.26,2578.08 ; v1(3703.56,2623) R26.1@3703.56,2654
  Mid Layer 1 w4: v1(3558,2620) 3561,2623 v1(3703.56,2623)
uSD_CLK: CN1.12 CN2.P5 | length 1743
  Top Layer w4: CN1.12@2825.63,1799.4 2825.63,1837.63 v1(2826,1838) ; v1(4103.47,2018.53) CN2.P5@4224.94,2018.53
  Bottom Layer w4: v1(2826,1838) 2849.86,1814.14 2977.43,1814.14 2987.29,1824 2987.29,1893.86 2986,1895.15 2986,2023 3093,2130 3992,2130 v1(4103.47,2018.53)
uSD_CMD: CN1.11 CN2.P3 R3.2 | length 2931.6
  Top Layer w4: v1(2845,1761) 2845.32,1761.32 CN1.11@2845.32,1799.4 ; v1(4276,1931.91) CN2.P3@4224.94,1931.91 4167,1931.91 4145,1909.91 4145,1856 4113,1824 4051,1824 4043,1832 4043,1952 4087,1996 4407,1996 4429,1974 R3.2@4429,1583.56
  Bottom Layer w4: v1(2845,1761) 3032,1574 3918.09,1574 v1(4276,1931.91)
uSD_D0: CN1.13 CN2.P7 R4.2 | length 2553.4
  Top Layer w4: CN1.13@2805.94,1799.4 2805.94,1761.06 v1(2806,1761) ; CN2.P7@4224.94,2105.14 4249.86,2105.14 ; v1(4259,2086) 4259,2096 4249.86,2105.14 ; R4.2@4481,1583.56 4481,2064.14 4440,2105.14 4249.86,2105.14
  Bottom Layer w4: v1(2806,1761) 2822,1777 3066,1777 3248,1595 3768,1595 v1(4259,2086)
uSD_D1: CN1.14 CN2.P8 R5.2 | length 2650.6
  Top Layer w4: CN1.14@2786.26,1799.4 v1(2786.26,1854) ; v1(4190,2149) 4190,2148.45 CN2.P8@4224.94,2148.45 4525.81,2148.45 4532.25,2142 R5.2@4532.25,1584
  Bottom Layer w4: v1(2786.26,1854) 2833.29,1854 2849,1869.71 2880.29,1869.71 2896,1854 2979.29,1854 2979.29,1884.71 2978,1886 2978,2113 3014,2149 v1(4190,2149)
uSD_D2: CN1.9 CN2.P1 R1.2 | length 1875
  Top Layer w4: CN1.9@2884.69,1799.4 2884.69,1761.31 v1(2885,1761) ; CN2.P1@4224.94,1845.3 4258.7,1845.3 4325,1779 R1.2@4325,1583.56 v1(4294.42,1583.56)
  Mid Layer 1 w4: v1(2885,1761) 2995,1761 3172.44,1583.56 v1(4294.42,1583.56)
uSD_D3: CN1.10 CN2.P2 R2.2 | length 2033.9
  Top Layer w4: CN1.10@2865,1799.4 v1(2865,1853) ; v1(4063.79,1762) 4190.39,1888.61 CN2.P2@4224.94,1888.61 4267,1888.61 4377,1778.61 R2.2@4377,1583.56
  Mid Layer 1 w4: v1(2865,1853) 2911,1807 3055,1807 3266,1596 3897.79,1596 v1(4063.79,1762)
uSD_DETECT: CN1.8 R6.1 SB1.2 | length 2138.2
  Top Layer w4: CN1.8@2904.37,1799.4 2904.37,1520.63 2921,1504 4612,1504 4612,1583.56 ; R6.1@4588,1583.56 4612,1583.56 ; SB1.2@4650.25,1576 4622.56,1576 4615,1583.56 4612,1583.56
VBUS: C15.2 CN6.1 R32.2 U4.5 | length 560.3
  Top Layer w4: R32.2@3837.75,3252.44 C15.2@3891,3252.44 3932,3252.44 3938.56,3259 3950,3259 ; U4.5@3981.34,3259 3950,3259 ; CN6.1@4255.69,3126.2 3991.8,3126.2 3950,3168 3950,3259
Y_A: CN8.10 U8.3 | length 1330.3
  Top Layer w4: U8.3@3054.84,4055.8 3054.84,4129 3061,4135.16 3061,4181 v1(3122,4242) ; v1(4017,3883) 4017.32,3883.32 CN8.10@4089.46,3883.32
  Bottom Layer w4: v1(3122,4242) 3334,4030 3469,4030 3616,3883 v1(4017,3883)
Y_K: CN8.9 R61.2 | length 261.7
  Top Layer w4: R61.2@3937,3788.12 3937,3872 3998.32,3933.32 CN8.9@4089.46,3933.32
pads on no net: CN8.MH1 CN8.MH2 U1.4 U1.11 U1.14 U1.16 U1.17 U1.19 U1.21 U1.22 U1.28 U1.29 U1.40 U1.41 U1.42 U1.43 U1.45 U1.46 U5.2 U5.4 U5.5 U5.6 U5.7 U5.13 U5.14 U6.4 U6.5 U6.12 U6.13

## Silkscreen, mask and mechanical layers (free items; w line width, h text height)
Mechanical 1:
  the board outline again, w10

## Dimensions
4822,4627 to 2264,4627 on Top Layer
4824,1321 to 4822,4627 on Top Layer